# Altium PCB PCB1.PcbDoc (part 4 of 4)
Units mm, origin at the board's own origin, x right, y up, seen from the top; angles counter-clockwise.
Board outline 125 x 60 mm, 4 copper layers (Top Copper, Top Ref, Botton Ref, Bottom Copper), stack 1.586 mm thick; 166 components, 89 nets, 449 pads, 336 vias.
Unrouted connection lines stored in the file: 10.
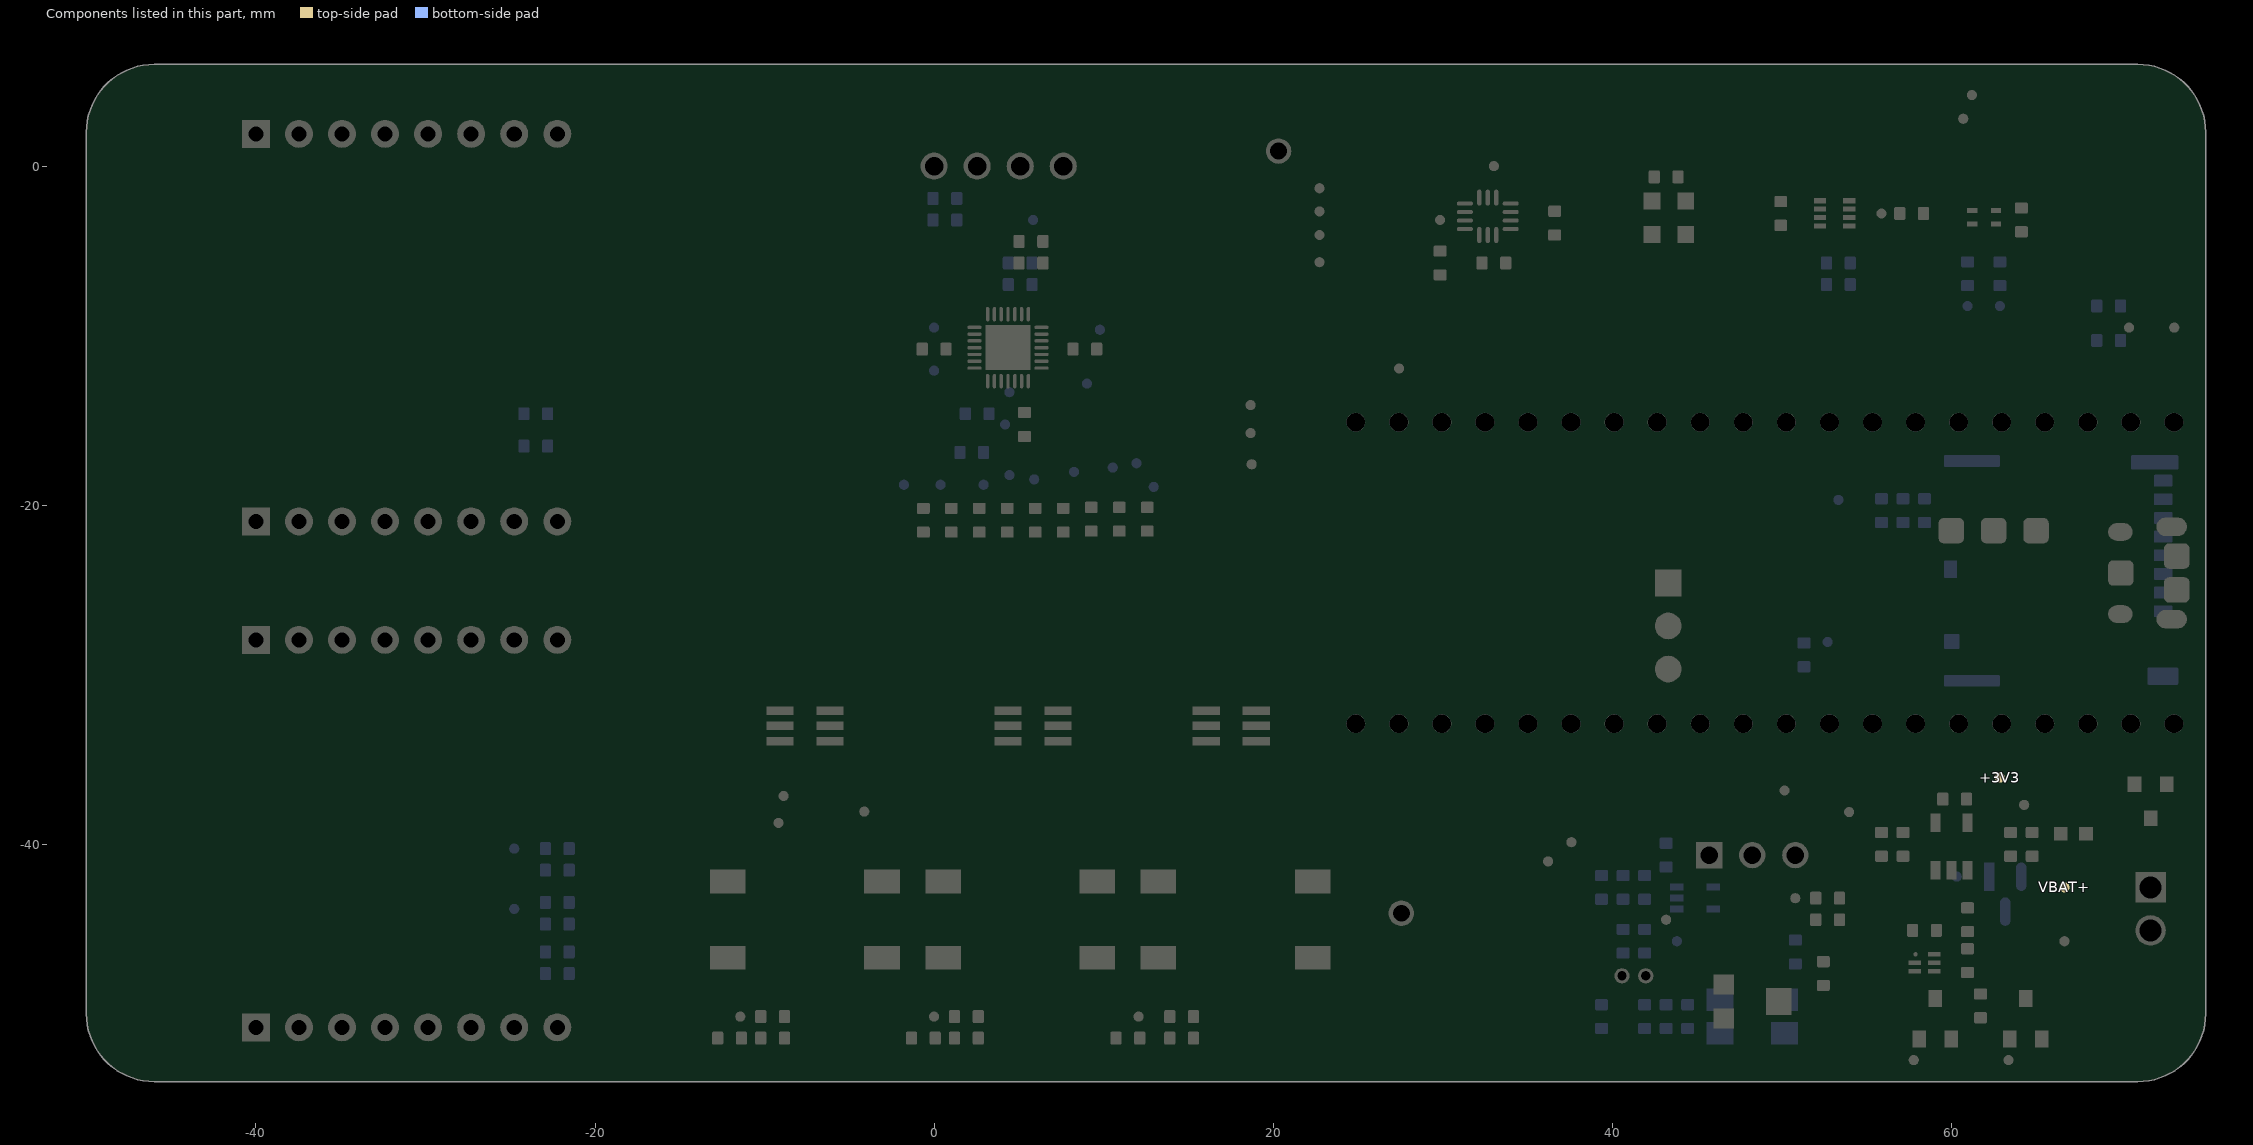
[diagram p5: the components of this part, seen from the top]

## Polygon pours and split planes (outlines as drawn) (continued)
VBAT+ on Top Copper "VBAT+_L01_P002" (solid, pour order 2): 74.295,-43.813 74.295,-37.719 69.977,-37.719 68.961,-38.735 68.961,-40.767 67.437,-40.767 66.294,-41.91 64.643,-41.91 64.008,-41.275 64.008,-40.259 60.076,-40.259 59.989,-44.45 66.421,-44.45 67.183,-43.688
GND on Bottom Copper "GND_L04_P025" (solid, remove dead copper, pour order 25): -50,6.071 75.057,6.071 75.057,-54 -50,-54 -50,-52.095
+3V3 on Bottom Copper (solid, pour order 10): -26.035,-53.975 55.88,-53.975 69.342,-40.513 69.342,-31.241 54.356,-31.241 54.356,-43.434 17.272,-43.554 17.272,-33.02 15.494,-31.242 -11.049,-31.242 -11.006,-31.285 -11.006,-34.573 9.877,-34.573 9.906,-34.544 11.684,-36.322 11.684,-43.572 -24.257,-43.688 -26.035,-45.466
+3V3 on Bottom Copper "+3V3_L04_P021" (solid, pour order 21): -26.162,-22.225 -19.558,-22.225 -16.256,-18.923 11.811,-18.923 20.955,-9.779 54.356,-9.779 54.356,-16.891 54.229,-17.018 69.342,-17.018 69.342,-3.302 62.992,1.27 62.23,1.778 -26.162,1.778
GND on Botton Ref (split plane): 71,5.49 71.229,5.49 71.682,5.43 72.124,5.311 72.547,5.136 72.943,4.908 73.306,4.629 73.629,4.306 73.908,3.943 74.136,3.547 74.311,3.124 74.43,2.682 74.49,2.229 74.49,2 74.49,-50 74.49,-50.229 74.43,-50.682 74.311,-51.124 74.136,-51.547 73.908,-51.943 73.629,-52.306 73.306,-52.629 72.943,-52.908 72.547,-53.136 72.124,-53.311 71.682,-53.43 71.229,-53.49 -46.229,-53.49 -46.682,-53.43 -47.124,-53.311 -47.547,-53.136 -47.943,-52.908 -48.306,-52.629 -48.629,-52.306 -48.908,-51.943 -49.136,-51.547 -49.311,-51.124 -49.43,-50.682 -49.49,-50.229 -49.49,-50 -49.49,2 -49.49,2.229 -49.43,2.682 -49.311,3.124 -49.136,3.547 -48.908,3.943 -48.629,4.306 -48.306,4.629 -47.943,4.908 -47.547,5.136 -47.124,5.311 -46.682,5.43 -46.229,5.49 -46,5.49
GND on Top Ref (split plane): 71,5.49 71.229,5.49 71.682,5.43 72.124,5.311 72.547,5.136 72.943,4.908 73.306,4.629 73.629,4.306 73.908,3.943 74.136,3.547 74.311,3.124 74.43,2.682 74.49,2.229 74.49,2 74.49,-50 74.49,-50.229 74.43,-50.682 74.311,-51.124 74.136,-51.547 73.908,-51.943 73.629,-52.306 73.306,-52.629 72.943,-52.908 72.547,-53.136 72.124,-53.311 71.682,-53.43 71.229,-53.49 -46.229,-53.49 -46.682,-53.43 -47.124,-53.311 -47.547,-53.136 -47.943,-52.908 -48.306,-52.629 -48.629,-52.306 -48.908,-51.943 -49.136,-51.547 -49.311,-51.124 -49.43,-50.682 -49.49,-50.229 -49.49,-50 -49.49,2 -49.49,2.229 -49.43,2.682 -49.311,3.124 -49.136,3.547 -48.908,3.943 -48.629,4.306 -48.306,4.629 -47.943,4.908 -47.547,5.136 -47.124,5.311 -46.682,5.43 -46.229,5.49 -46,5.49

## Other copper
Top Copper:
  pour cut-out: -8.763,3.81 -8.763,3.135 -10.694,3.135 -10.694,3.77 -10.567,3.77
  pour cut-out: 15.042,-19.475 15.042,-20.15 13.111,-20.15 13.111,-19.515 13.238,-19.515
  pour cut-out: 41.839,-4.997 41.839,-5.672 39.908,-5.672 39.908,-5.037 40.035,-5.037
  pour cut-out: 43.109,-11.982 43.109,-12.657 41.178,-12.657 41.178,-12.022 41.305,-12.022
  pour cut-out: 42.093,-11.982 42.093,-12.657 40.162,-12.657 40.162,-12.022 40.289,-12.022
  pour cut-out: 44.76,-11.982 44.76,-12.657 42.829,-12.657 42.829,-12.022 42.956,-12.022
  pour cut-out: 54.412,-9.188 54.412,-9.863 52.481,-9.863 52.481,-9.228 52.608,-9.228
  pour cut-out: 53.893,-11.714 53.893,-12.53 45.496,-12.53 45.496,-11.895 45.623,-11.895
  pour cut-out: -35.067,3.655 -35.067,2.98 -36.997,2.98 -36.997,3.615 -36.87,3.615
  pour cut-out: 15.482,-51.354 15.482,-52.028 13.551,-52.028 13.551,-51.393 13.678,-51.393
  pour cut-out: 2.782,-51.354 2.782,-52.028 0.851,-52.028 0.851,-51.393 0.978,-51.393
  pour cut-out: -8.519,-51.328 -8.519,-52.003 -10.449,-52.003 -10.449,-51.368 -10.322,-51.368
  pour cut-out: 72.7,-11.982 72.7,-12.657 70.769,-12.657 70.769,-12.022 70.896,-12.022
  pour cut-out: -6.548,-34.334 -6.548,-35.009 -8.479,-35.009 -8.479,-34.374 -8.352,-34.374
  pour cut-out: -18.613,-45.256 -18.613,-45.931 -20.544,-45.931 -20.544,-45.296 -20.417,-45.296
  pour cut-out: 47.439,-31.137 47.439,-31.812 45.508,-31.812 45.508,-31.177 45.635,-31.177
  pour cut-out: -16.581,-39.287 -16.581,-39.962 -18.512,-39.962 -18.512,-39.327 -18.385,-39.327
  pour cut-out: -16.942,-37.806 -16.942,-38.481 -18.872,-38.481 -18.872,-37.846 -18.745,-37.846
  pour cut-out: -2.611,-24.555 -2.611,-25.23 -4.542,-25.23 -4.542,-24.595 -4.415,-24.595
Bottom Copper:
  pour cut-out: -11.881,-41.431 -11.881,-41.402 -11.176,-41.402 -11.176,-41.021 -11.938,-41.021
  pour cut-out: 36.393,-29 36.393,-29.675 38.324,-29.675 38.324,-29.04 38.197,-29.04
  pour cut-out: 31.597,-35.52 31.597,-36.195 33.528,-36.195 33.528,-35.56 33.401,-35.56
  pour cut-out: 49.107,-48.387 49.953,-48.387 49.953,-47.23 49.107,-47.23
  pour cut-out: 41.275,-50.56 42.121,-50.56 42.121,-49.544 42.059,-49.606 41.275,-49.606
  pour cut-out: 44.45,-50.927 45.32,-50.927 45.32,-49.465 44.45,-49.465

## Silkscreen, mask and mechanical layers (free items; w line width, h text height)
Top Overlay:
  drawing of 141 lines, arcs and shapes, not listed
  text "OLED Display 0.96\"" at -2.421,3.113 h1.7
  text "Sensors" at 44.561,3.068 h1.7
  text "GND" at 21.844,0.399 h1.5
  text "Light" at 50.284,-9.587 h1.7
  text "Motion" at 30.004,-9.888 h1.7
  text "Pressure" at 40.019,-9.888 h1.7
  text "T. & H." at 60.532,-9.878 h1.7
  text "RGB LED's" at 0.648,-28.175 h1.7
  text "Raspberry Pi Pico W" at 23.88,-37.527 h1.7
  text "Push Buttons" at -0.267,-38.463 h1.7
  text "+" at 67.31,-42.684 h1.5
  text "Mic" at 39.954,-42.782 h1.7
  text "GND" at 29.083,-44.305 h1.5
  text "-" at 67.31,-45.977 h1.5
  text "PCEIOT Board .version" at 22.435,-52.432 h1.7
Bottom Overlay:
  drawing of 94 lines, arcs and shapes, not listed
  text "+3V3" at 59.944,-1.125 h1.5
  text "R3" at 54.737,-1.252 h1.5
  text "OPT4001DTSR_ADDR" at 50.165,-1.894 h1.5
  text "GND" at 59.69,-2.776 h1.5
  text "R4" at 54.737,-2.921 h1.5
  text "+3V3" at 2.286,-5.824 h1.5
  text "R18" at -2.921,-5.951 h1.5
  text "SX15_ADDR0" at -7.874,-6.72 h1.5
  text "GND" at 2.032,-7.475 h1.5
  text "R22" at -2.921,-7.62 h1.5
  text "+3V3" at -2.921,-15.349 h1.5
  text "R17" at -8.128,-15.494 h1.5
  text "SX15_ADDR1" at -12.954,-16.118 h1.5
  text "GND" at -3.175,-17 h1.5
  text "R21" at -8.128,-17.018 h1.5
  text "SDCard" at 57.678,-28.487 h1.7 r270
  text "R34" at -27.813,-32.113 h1.5
  text "SPI0_TX" at -20.447,-32.12 h1.5
  text "MB_MISO" at -32.766,-32.882 h1.5
  text "SPI0_RX" at -20.447,-33.644 h1.5
  text "R32" at -27.813,-33.891 h1.5
  text "R36" at -27.686,-36.304 h1.5
  text "SPI0_TX" at -20.32,-36.311 h1.5
  text "MB_MOSI" at -32.766,-37.073 h1.5
  text "SPI0_RX" at -20.32,-37.835 h1.5
  text "R35" at -27.686,-38.082 h1.5
  text "Mic." at 44.549,-38.082 h1.7
  text "PCEIOT Board .version" at 9.95,-51.162 h1.7
Mechanical 1:
  the board outline again, w0.2

## Text inside footprints (layer, text, board x,y; h text height)
DISP1: Top Overlay "CL" at 4.269,-2.079 h1.5; Top Overlay "VC" at 1.613,-2.079 h1.5; Top Overlay "GN" at -0.909,-2.079 h1.5; Top Overlay "DA" at 6.693,-2.08 h1.5
J1: Top Overlay "PWM" at -39.339,-4.19 h1.5 r90; Top Overlay "AN" at -39.339,-18.18 h1.5 r90; Top Overlay "+5V" at -24.099,-3.321 h1.5 r90; Top Overlay "GND" at -21.559,-3.905 h1.5 r90; Top Overlay "TX" at -31.719,-2.529 h1.5 r90; Top Overlay "RX" at -34.259,-2.618 h1.5 r90; Top Overlay "INT" at -36.799,-2.927 h1.5 r90; Top Overlay "SCL" at -29.179,-3.512 h1.5 r90; Top Overlay "GND" at -21.559,-18.18 h1.5 r90; Top Overlay "+3.3V" at -24.099,-18.18 h1.5 r90; Top Overlay "MOSI" at -26.639,-18.18 h1.5 r90; Top Overlay "SCK" at -31.719,-18.18 h1.5 r90; Top Overlay "MISO" at -29.179,-18.18 h1.5 r90; Top Overlay "CS" at -34.259,-18.18 h1.5 r90; Top Overlay "RST" at -36.799,-18.18 h1.5 r90; Top Overlay "SDA" at -26.639,-3.745 h1.5 r90
J2: Top Overlay "PWM" at -39.339,-34.035 h1.5 r90; Top Overlay "AN" at -39.339,-48.025 h1.5 r90; Top Overlay "+5V" at -24.099,-33.166 h1.5 r90; Top Overlay "GND" at -21.559,-33.75 h1.5 r90; Top Overlay "TX" at -31.719,-32.374 h1.5 r90; Top Overlay "RX" at -34.259,-32.463 h1.5 r90; Top Overlay "INT" at -36.799,-32.772 h1.5 r90; Top Overlay "SCL" at -29.179,-33.357 h1.5 r90; Top Overlay "GND" at -21.559,-48.025 h1.5 r90; Top Overlay "+3.3V" at -24.099,-48.025 h1.5 r90; Top Overlay "MOSI" at -26.639,-48.025 h1.5 r90; Top Overlay "SCK" at -31.719,-48.025 h1.5 r90; Top Overlay "MISO" at -29.179,-48.025 h1.5 r90; Top Overlay "CS" at -34.259,-48.025 h1.5 r90; Top Overlay "RST" at -36.799,-48.025 h1.5 r90; Top Overlay "SDA" at -26.639,-33.59 h1.5 r90
MK1: Top Overlay "-" at 40.64,-48.514 h1.5 r180; Top Overlay "+" at 42.291,-48.387 h1.5 r180